# EAGLE board PCB_v36 (EAGLE 9.7.0)
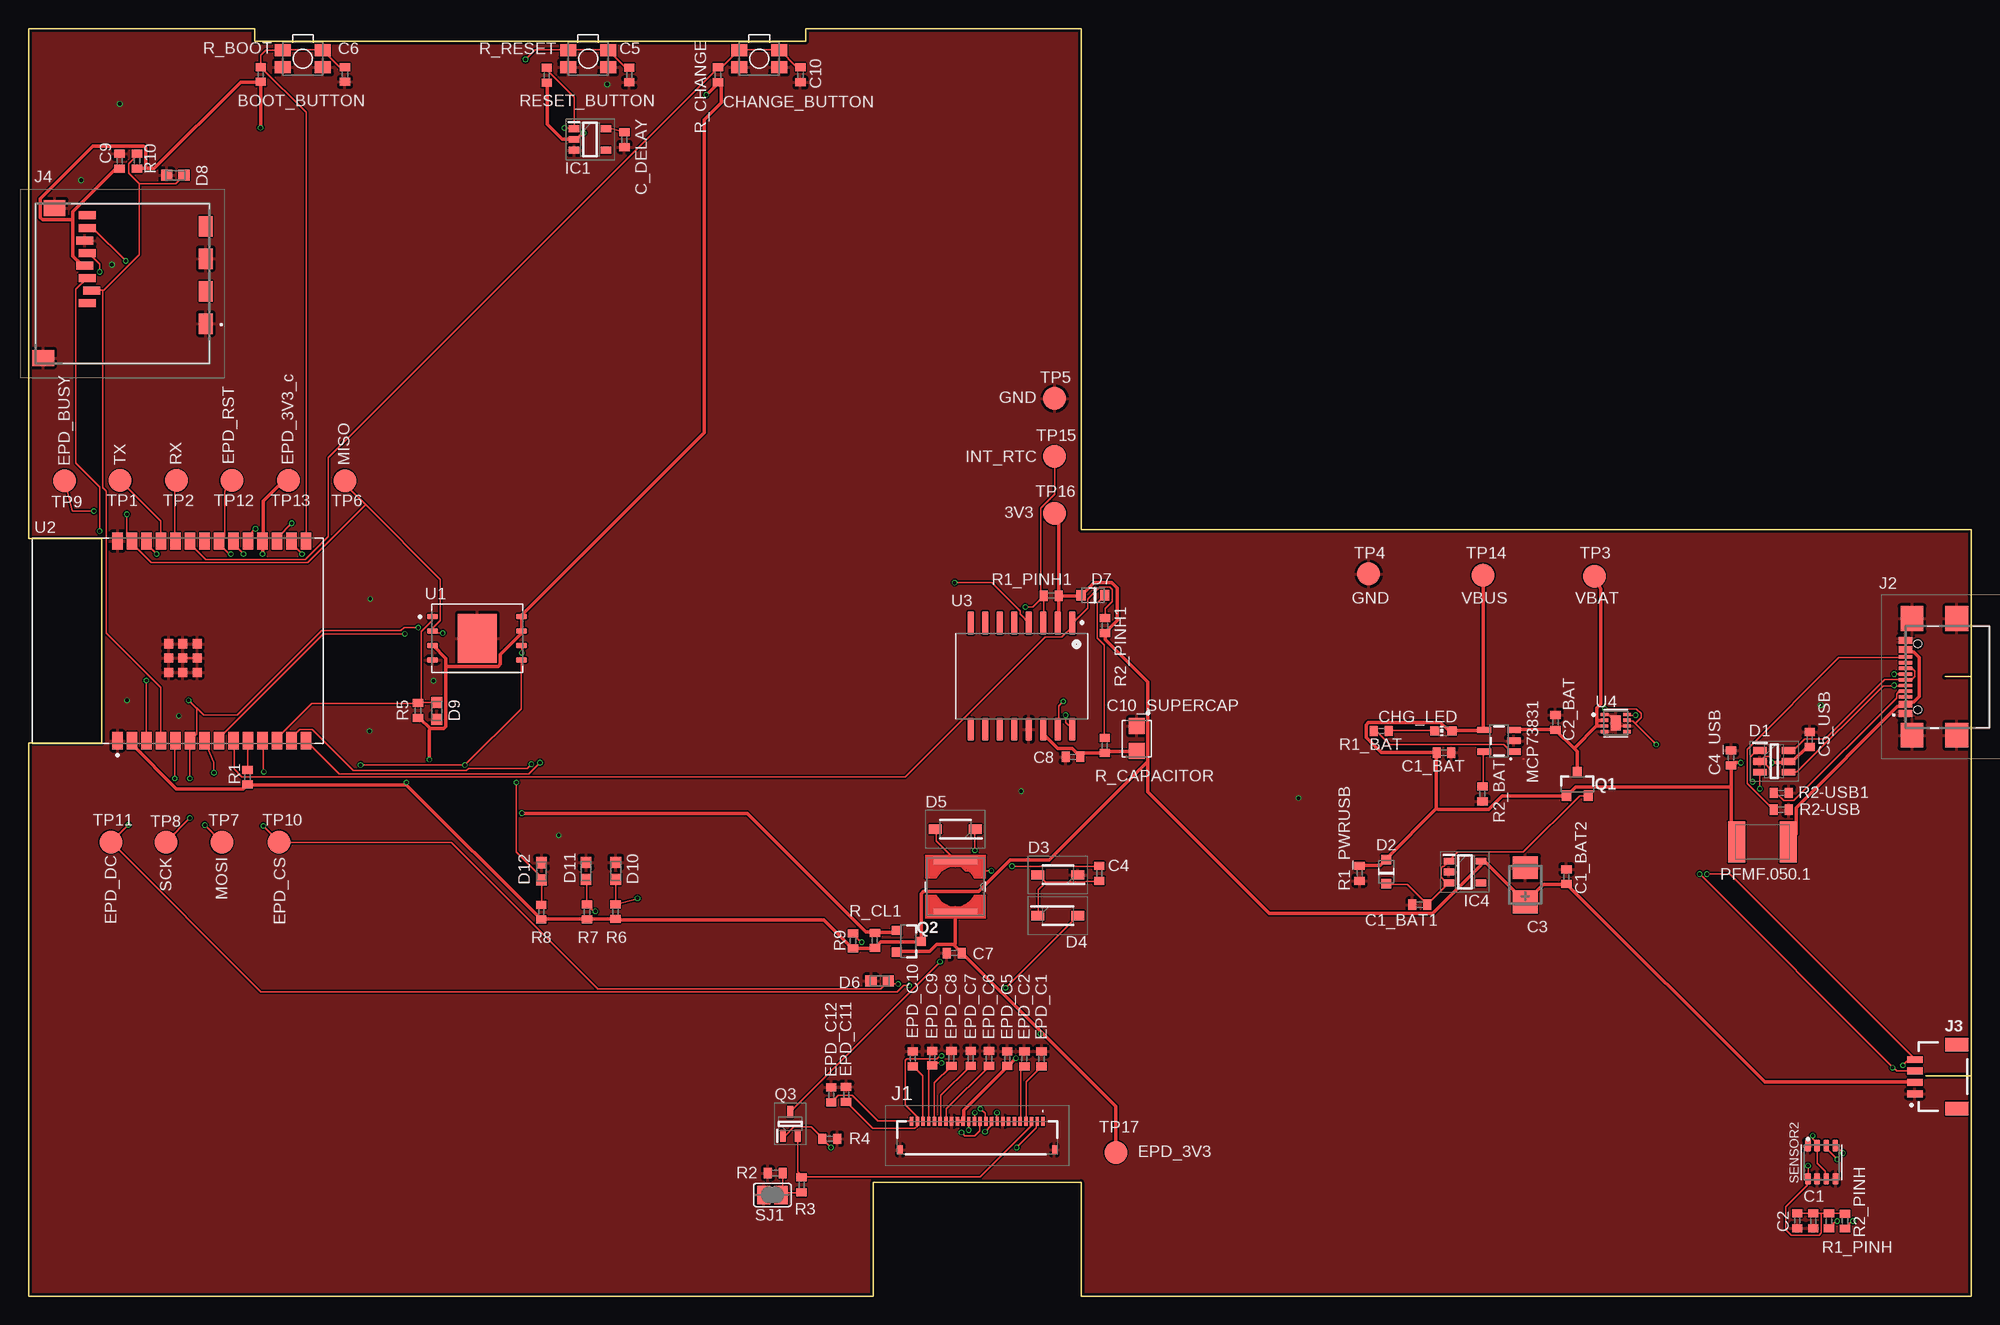
[diagram p0: board, top side]
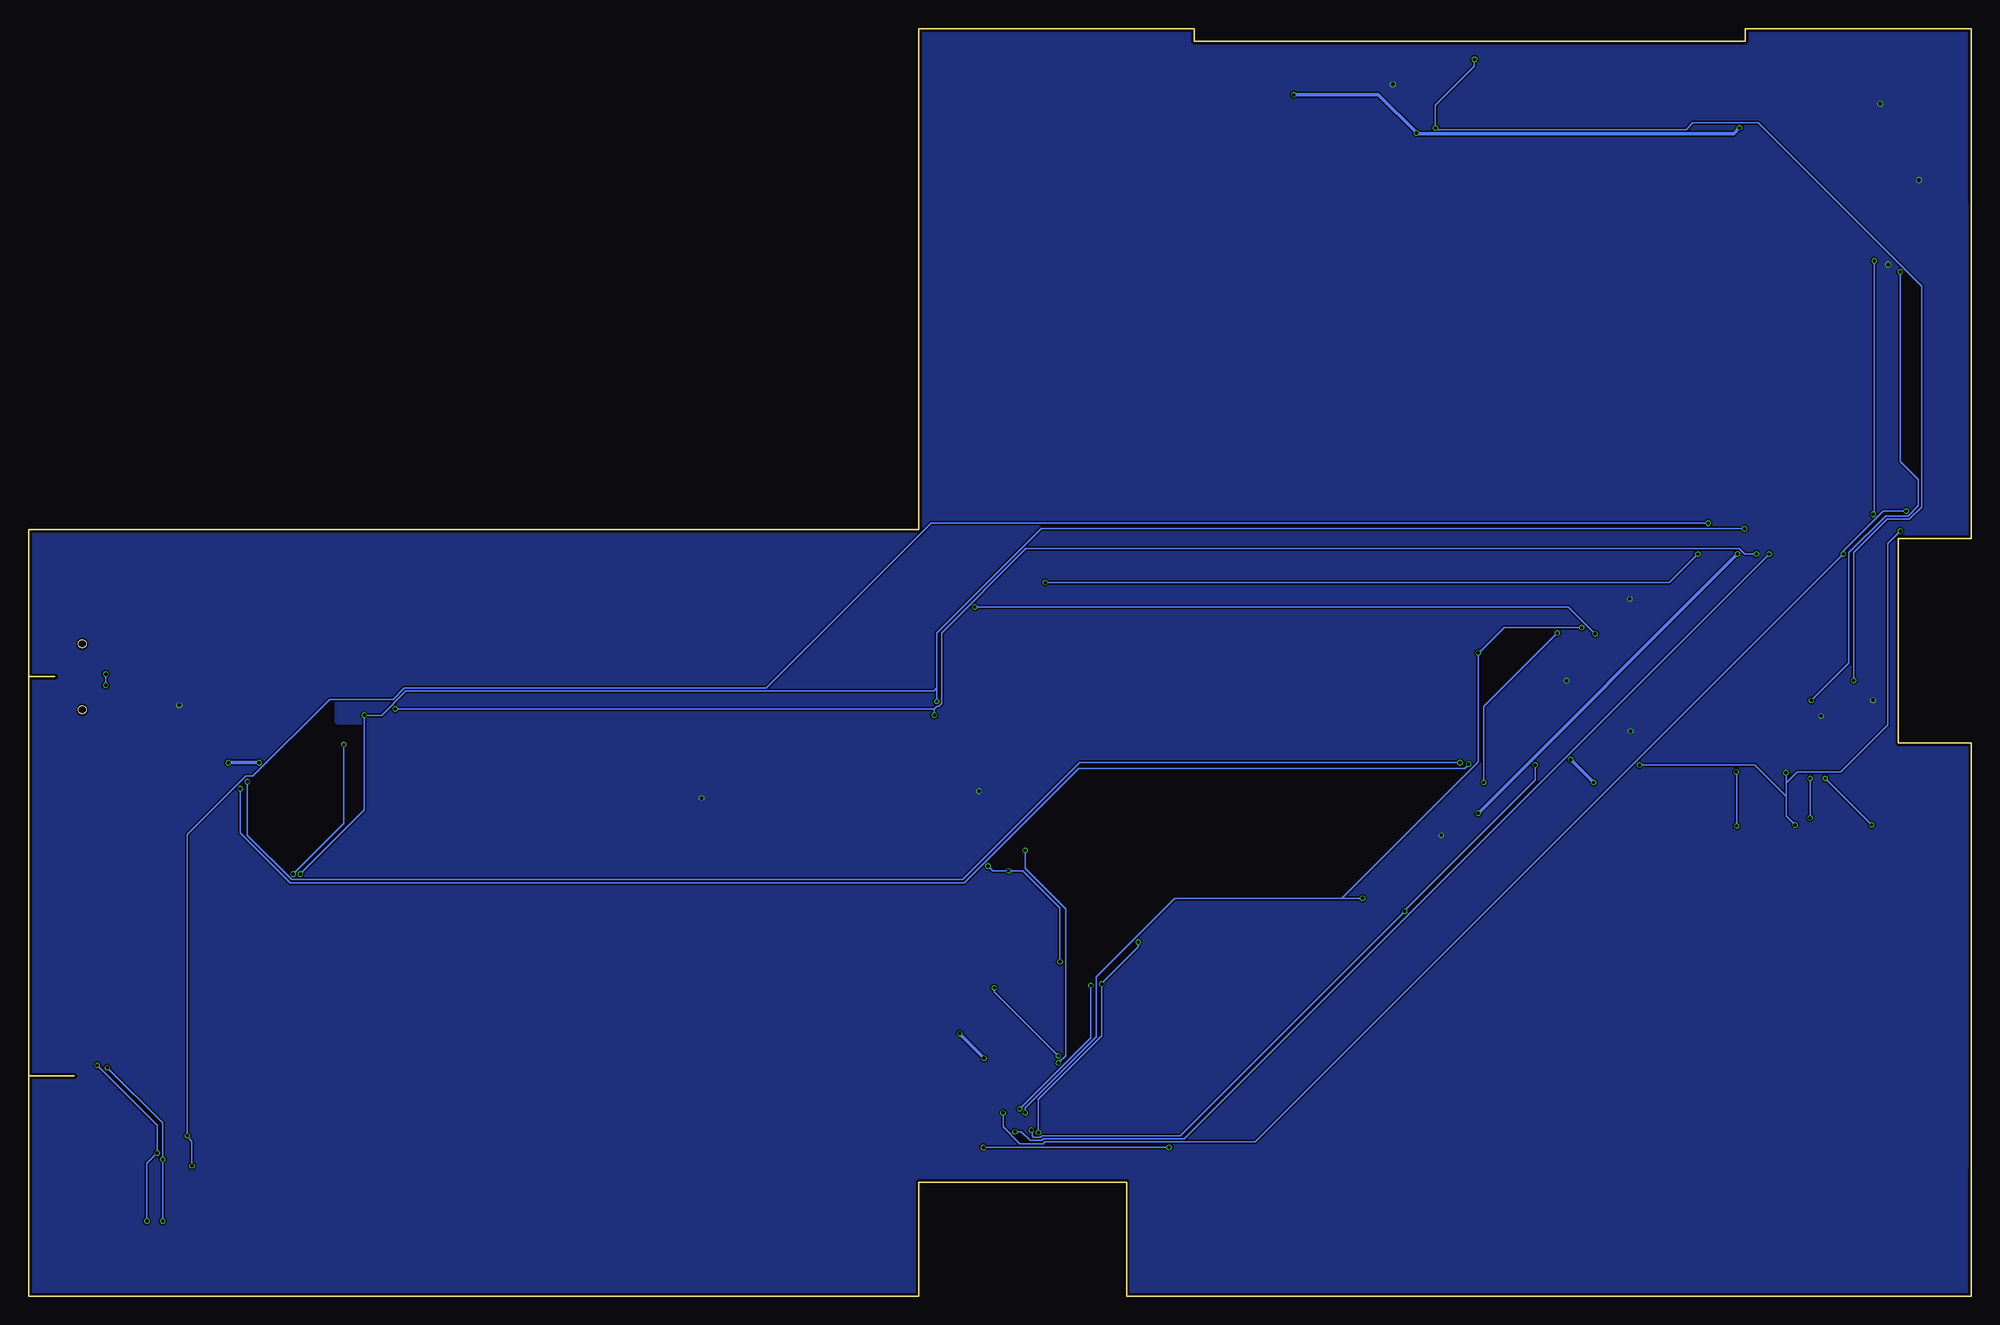
[diagram p1: board, bottom side, seen from below]

Size 170.2 x 111.1 mm. Coordinates in mm from the lower left corner, seen from the top.
Outline: 170.2,54.3 170.2,67.2 92.2,67.2 92.2,111.1 68.1,111.1 68.1,110 19.8,110 19.8,111.1 0,111.1 0,95.8 0,66.4 6.4,66.4 6.4,48.5 0,48.5 0,11.1 0,0 74,0 74,10 92.2,10 92.2,0 170.2,0 170.2,19.3
Outline: 170.2,54.3 170.2,19.3
Outline: 170.2,54.3 167.9,54.3
Outline: 170.2,19.3 166.2,19.3
Copper layers (1*16): Top 0.035mm / dielectric 1.6mm / Bottom 0.035mm
Design rules "jlcpcb-2layers.dru *": minimum track width 0.15mm, minimum drill 0.3mm, track to track 5mil, track to pad 5mil, pad to pad 5mil, via to via 5mil, smd to smd 5mil, copper to edge 0.2mm, drill to drill 6mil, minimum pad ring 10mil, minimum via ring 3mil, stop-mask expansion 4mil, vias tented up to drill 0mil, thermal gap 10mil
Net classes: 1 power: width 0.3 mm

## Footprints (pad centres in the part's own frame; a part is rotated, then mirrored left to right if it is on the bottom)
MYBUTTON = smd 1.4 x 1.05: 1 1.75,0.75; 2 -1.75,0.75; 3 -1.75,-0.75; 4 1.75,-0.75
ESP32_WROVER_EAGLE-LTSPICE_C0402 = smd 0.7 x 0.9: 1 -0.65,0; 2 0.65,0
RCL_CT3528 = smd 2 x 2.2: + -1.5,0; - 1.5,0
CAPCP3225X100N = smd 1.4 x 1.4: 1 -1.1,0; 2 1.1,0
ADAFRUIT_CHIP-LED0603 = smd 0.8 x 0.8: A 0,-0.75; C 0,0.75
SOT95P280X145-6N = smd 1.2 x 0.6: 1 -1.25,0.95; 2 -1.25,0; 3 -1.25,-0.95; 4 1.25,-0.95; 5 1.25,0; 6 1.25,0.95
ESP32_WROVER_AVX---SD0805S020S1R0_AVX_SD0805S020S1R0_0 = smd 0.8 x 0.9: 1 -1.05,0; 2 1.05,0
SOD3716X135N = smd 1.15 x 0.8: 1 -1.75,0; 2 1.75,0
DIOC1608X36N = smd 0.97 x 0.94: 1 -0.75,0; 2 0.75,0
SOT95P280X120-5N = smd 0.9 x 0.6: 1 -1.4,0.95; 2 -1.4,0; 3 -1.4,-0.95; 4 1.4,-0.95; 5 1.4,0.95
FH34SRJ24S05SH99 = smd 0.3 x 0.8: 1 5.75,1.45; 2 5.25,1.45; 3 4.75,1.45; 4 4.25,1.45; 5 3.75,1.45; 6 3.25,1.45; 7 2.75,1.45; 8 2.25,1.45; 9 1.75,1.45; 10 1.25,1.45; 11 0.75,1.45; 12 0.25,1.45; 13 -0.25,1.45; 14 -0.75,1.45; 15 -1.25,1.45; 16 -1.75,1.45; 17 -2.25,1.45; 18 -2.75,1.45; 19 -3.25,1.45; 20 -3.75,1.45; 21 -4.25,1.45; 22 -4.75,1.45; 23 -5.25,1.45; 24 -5.75,1.45 | smd 0.4 x 0.8: MP1 6.75,-1.05; MP2 -6.75,-1.05
SAMACSYS_PARTS_USB4110GFA = smd 0.3 x 1.15: A1 -3.35,3.678; A4 -2.55,3.678; A5 -1.25,3.678; A6 -0.25,3.678; A7 0.25,3.678; A8 1.25,3.678; A9 2.55,3.678; A12 3.35,3.678; B1 3.05,3.678; B4 2.25,3.678; B5 1.75,3.678; B6 0.75,3.678; B7 -0.75,3.678; B8 -1.75,3.678; B9 -2.25,3.678; B12 -3.05,3.678 | smd 2.18 x 2: MP1 -5.11,-0.827; MP2 5.11,-0.827; MP3 -5.11,3.103; MP4 5.11,3.103 | hole 0.65: -2.89,2.603; 2.89,2.603
JST04_1MM_RA = smd 0.6 x 1.35: 1 -1.5,0; 2 -0.5,0; 3 0.5,0; 4 1.5,0 | smd 1.2 x 2: NC1 2.8,-3.675; NC2 -2.8,-3.675
112ATAARR03ATTEND = smd 1.8 x 1.2: G1 10.6,10.4; G2 4.9,10.4; S1 7.75,10.4; S2 2.05,10.4 | smd 1.4 x 1.9: G3 13.6,-3.85; G4 0.45,-2.85 | smd 0.7 x 1.5: P1 8.8,0; P2 7.7,0.4; P3 6.6,0; P4 5.5,-0.2; P5 4.4,0; P6 3.3,-0.2; P7 2.2,0; P8 1.1,0
IND_4828-WE-TPC_WRE = smd 0.635 x 3.81: 1 -2.286,0; 2 2.286,0
ESP32_WROVER_SPARKFUN-IC-POWER_SOT23-5 = smd 0.55 x 1.2: 1 -0.95,-1.3; 2 0,-1.3; 3 0.95,-1.3; 4 0.95,1.3; 5 -0.95,1.3
ESP32C6_VARISTOR_CT/CN1812 = smd 1.5 x 3.6: 1 -2.25,0; 2 2.25,0
ESP32_WROVER_SPARKFUN-DISCRETESEMI_SOT23-3 = smd 0.8 x 0.9: 1 -0.95,-1; 2 0.95,-1; 3 0,1.1
SOT65P210X110-3N = smd 1.05 x 0.5: 1 -1.05,0.65; 2 -1.05,-0.65; 3 1.05,0
ESP32_WROVER_EAGLE-LTSPICE_R0402 = smd 0.7 x 0.9: 1 -0.65,0; 2 0.65,0
ESP32_WROVER_BME680_PSON80P300X300X100-8N = smd 1.016 x 0.5: 1 1.458,1.2; 2 1.458,0.4; 3 1.458,-0.4; 4 1.458,-1.2; 5 -1.458,-1.22; 6 -1.458,-0.4; 7 -1.458,0.4; 8 -1.458,1.2
SJ = smd 1.168 x 1.6: 1 -0.762,0; 2 0.762,0
TP20R = smd 2 x 2: TP 0,0
SON127P600X800X80-9N = smd 0.94 x 0.44: 1 -3.895,1.905; 2 -3.895,0.635; 3 -3.895,-0.635; 4 -3.895,-1.905; 5 3.895,-1.905; 6 3.895,-0.635; 7 3.895,0.635; 8 3.895,1.905 | smd 3.4 x 4.3: 9 0,0
XCVR_ESP32-C6-WROOM-1-N8 = smd 1.5 x 0.9: 1 -8.75,5.26; 2 -8.75,3.99; 3 -8.75,2.72; 4 -8.75,1.45; 5 -8.75,0.18; 6 -8.75,-1.09; 7 -8.75,-2.36; 8 -8.75,-3.63; 9 -8.75,-4.9; 10 -8.75,-6.17; 11 -8.75,-7.44; 12 -8.75,-8.71; 13 -8.75,-9.98; 14 -8.75,-11.25; 15 8.75,-11.25; 16 8.75,-9.98; 17 8.75,-8.71; 18 8.75,-7.44; 19 8.75,-6.17; 20 8.75,-4.9; 21 8.75,-3.63; 22 8.75,-2.36; 23 8.75,-1.09; 24 8.75,0.18; 25 8.75,1.45; 26 8.75,2.72; 27 8.75,3.99; 28 8.75,5.26 | smd 0.8 x 0.8: 29_1 -2.755,0.79; 29_2 -1.505,0.79; 29_3 -0.255,0.79; 29_4 -2.755,-0.46; 29_5 -1.505,-0.46; 29_6 -0.255,-0.46; 29_7 -2.755,-1.71; 29_8 -1.505,-1.71; 29_9 -0.255,-1.71
SOIC127P1032X265-16N = smd 2.05 x 0.59: 1 -4.655,4.445; 2 -4.655,3.175; 3 -4.655,1.905; 4 -4.655,0.635; 5 -4.655,-0.635; 6 -4.655,-1.905; 7 -4.655,-3.175; 8 -4.655,-4.445; 9 4.655,-4.445; 10 4.655,-3.175; 11 4.655,-1.905; 12 4.655,-0.635; 13 4.655,0.635; 14 4.655,1.905; 15 4.655,3.175; 16 4.655,4.445
SON50P200X200X80-9N = smd 0.76 x 0.27: 1 -0.985,0.75; 2 -0.985,0.25; 3 -0.985,-0.25; 4 -0.985,-0.75; 5 0.985,-0.75; 6 0.985,-0.25; 7 0.985,0.25; 8 0.985,0.75 | smd 0.9 x 1.3: 9 0,0

## Placement (x,y rotation side)
BOOT_BUTTON  BUTTON_CUSYOMV1  [MYBUTTON]  24.03,108.44 180 top
C1  100nF  [ESP32_WROVER_EAGLE-LTSPICE_C0402]  156.34,6.61 270 top
C1_BAT  4.7uF  [ESP32_WROVER_EAGLE-LTSPICE_C0402]  123.99,47.64 0 top
C1_BAT1  4.7uF  [ESP32_WROVER_EAGLE-LTSPICE_C0402]  121.87,34.32 180 top
C1_BAT2  4.7uF  [ESP32_WROVER_EAGLE-LTSPICE_C0402]  134.72,36.77 90 top
C2  100nF  [ESP32_WROVER_EAGLE-LTSPICE_C0402]  154.94,6.63 270 top
C2_BAT  4.7uF  [ESP32_WROVER_EAGLE-LTSPICE_C0402]  133.76,50.3 90 top
C3  100uF TANT  [RCL_CT3528]  131.11,36.06 90 top
C4  4.7uF/25V  [ESP32_WROVER_EAGLE-LTSPICE_C0402]  93.8,37.06 90 top
C4_USB  100nF  [ESP32_WROVER_EAGLE-LTSPICE_C0402]  149.14,47.19 90 top
C5  1uF  [ESP32_WROVER_EAGLE-LTSPICE_C0402]  52.62,107.03 270 top
C5_USB  4.7uF  [ESP32_WROVER_EAGLE-LTSPICE_C0402]  156.04,48.8 90 top
C6  100nF  [ESP32_WROVER_EAGLE-LTSPICE_C0402]  27.72,107.08 270 top
C7  10uF  [ESP32_WROVER_EAGLE-LTSPICE_C0402]  81.09,30.08 180 top
C8  100nF  [ESP32_WROVER_EAGLE-LTSPICE_C0402]  91.5,47.28 180 top
C9  100nF  [ESP32_WROVER_EAGLE-LTSPICE_C0402]  7.98,99.48 90 top
C10  100nF  [ESP32_WROVER_EAGLE-LTSPICE_C0402]  67.62,107.04 270 top
C10_SUPERCAP  CPH3225A  [CAPCP3225X100N]  97.08,48.87 270 top
C_DELAY  100nF  [ESP32_WROVER_EAGLE-LTSPICE_C0402]  52.2,101.36 270 top
CHANGE_BUTTON  BUTTON_CUSYOMV1  [MYBUTTON]  64.01,108.44 180 top
CHG_LED  [ADAFRUIT_CHIP-LED0603]  123.95,49.55 90 top
D1  USBLC6-2SC6Y  [SOT95P280X145-6N]  152.92,46.88 0 top
D2  SD0805S020S1R0  [ESP32_WROVER_AVX---SD0805S020S1R0_AVX_SD0805S020S1R0_0]  118.93,37.21 90 top
D3  MBR0530  [SOD3716X135N]  90.17,36.94 180 top
D4  MBR0530  [SOD3716X135N]  90.17,33.36 0 top
D5  MBR0530  [SOD3716X135N]  81.19,40.94 180 top
D6  PGB1010603MR  [DIOC1608X36N]  74.55,27.64 180 top
D7  SD0805S020S1R0  [ESP32_WROVER_AVX---SD0805S020S1R0_AVX_SD0805S020S1R0_0]  93.24,61.43 180 top
D8  PGB1010603MR  [DIOC1608X36N]  12.87,98.24 180 top
D9  PGB1010603MR  [DIOC1608X36N]  35.76,51.29 270 top
D10  PGB1010603MR  [DIOC1608X36N]  51.44,37.29 90 top
D11  PGB1010603MR  [DIOC1608X36N]  48.84,37.27 90 top
D12  PGB1010603MR  [DIOC1608X36N]  44.94,37.25 90 top
EPD_C1  1uF/50V  [ESP32_WROVER_EAGLE-LTSPICE_C0402]  88.74,20.81 90 top
EPD_C2  1uF/50V  [ESP32_WROVER_EAGLE-LTSPICE_C0402]  87.24,20.82 90 top
EPD_C5  1uF/50V  [ESP32_WROVER_EAGLE-LTSPICE_C0402]  85.74,20.83 90 top
EPD_C6  1uF/50V  [ESP32_WROVER_EAGLE-LTSPICE_C0402]  84.14,20.84 90 top
EPD_C7  1uF/50V  [ESP32_WROVER_EAGLE-LTSPICE_C0402]  82.54,20.85 90 top
EPD_C8  1uF/50V  [ESP32_WROVER_EAGLE-LTSPICE_C0402]  80.84,20.86 90 top
EPD_C9  1uF/50V  [ESP32_WROVER_EAGLE-LTSPICE_C0402]  79.16,20.88 90 top
EPD_C10  1uF/50V  [ESP32_WROVER_EAGLE-LTSPICE_C0402]  77.46,20.82 90 top
EPD_C11  1uF/50V  [ESP32_WROVER_EAGLE-LTSPICE_C0402]  71.62,17.69 90 top
EPD_C12  1uF/50V  [ESP32_WROVER_EAGLE-LTSPICE_C0402]  70.32,17.65 90 top
IC1  BD5229G-TR  [SOT95P280X120-5N]  49.19,101.38 0 top
IC4  XC6220A331MR-G  [SOT95P280X120-5N]  125.83,37.18 0 top
J1  FH34SRJ-24S-0.5SH_99_  [FH34SRJ24S05SH99]  83.11,13.88 0 top
J2  [SAMACSYS_PARTS_USB4110GFA]  168.1,54.28 90 top
J3  QWIIC_RIGHT_ANGLE  [JST04_1MM_RA]  165.25,19.25 90 top
J4  112A-TAAR-R03_ATTEND  [112ATAARR03ATTEND]  5.13,95.82 270 top
L1  744043680IND_4828-WE-TPC_WRE  [IND_4828-WE-TPC_WRE]  81.2,35.9 270 top
MCP73831  ESP32_WROVER_SPARKFUN-IC-POWER_MCP73831  [ESP32_WROVER_SPARKFUN-IC-POWER_SOT23-5]  128.82,48.68 90 top
PFMF.050.1  [ESP32C6_VARISTOR_CT/CN1812]  151.89,39.82 180 top
Q1  20V/4.2A/52mΩ/1.4W  [ESP32_WROVER_SPARKFUN-DISCRETESEMI_SOT23-3]  135.67,44.86 0 top
Q2  20V/4.2A/52mΩ/1.4W  [ESP32_WROVER_SPARKFUN-DISCRETESEMI_SOT23-3]  77.06,31.11 270 top
Q3  SI1308EDL-T1-GE3  [SOT65P210X110-3N]  66.73,15.11 90 top
R1  10k  [ESP32_WROVER_EAGLE-LTSPICE_R0402]  19.18,45.49 90 top
R1_BAT  200  [ESP32_WROVER_EAGLE-LTSPICE_R0402]  118.51,49.54 0 top
R1_PINH  10K  [ESP32_WROVER_EAGLE-LTSPICE_R0402]  157.72,6.61 90 top
R1_PINH1  10K  [ESP32_WROVER_EAGLE-LTSPICE_R0402]  89.58,61.4 0 top
R1_PWRUSB  100k  [ESP32_WROVER_EAGLE-LTSPICE_R0402]  116.6,37.07 90 top
R2  2.2  [ESP32_WROVER_EAGLE-LTSPICE_R0402]  65.41,10.8 0 top
R2-USB  5k1  [ESP32_WROVER_EAGLE-LTSPICE_R0402]  153.53,42.64 0 top
R2-USB1  5k1  [ESP32_WROVER_EAGLE-LTSPICE_R0402]  153.55,44.12 180 top
R2_BAT  2k  [ESP32_WROVER_EAGLE-LTSPICE_R0402]  127.36,44.02 90 top
R2_PINH  10K  [ESP32_WROVER_EAGLE-LTSPICE_R0402]  159.12,6.59 90 top
R2_PINH1  10K  [ESP32_WROVER_EAGLE-LTSPICE_R0402]  94.3,58.78 270 top
R3  0.47  [ESP32_WROVER_EAGLE-LTSPICE_R0402]  67.72,9.77 270 top
R4  10k  [ESP32_WROVER_EAGLE-LTSPICE_R0402]  70.19,13.8 0 top
R5  10K  [ESP32_WROVER_EAGLE-LTSPICE_R0402]  34.12,51.33 270 top
R6  10K  [ESP32_WROVER_EAGLE-LTSPICE_R0402]  51.42,33.71 270 top
R7  10K  [ESP32_WROVER_EAGLE-LTSPICE_R0402]  48.92,33.69 270 top
R8  10K  [ESP32_WROVER_EAGLE-LTSPICE_R0402]  44.92,33.67 270 top
R9  10K  [ESP32_WROVER_EAGLE-LTSPICE_R0402]  72.22,31.15 270 top
R10  10K  [ESP32_WROVER_EAGLE-LTSPICE_R0402]  9.51,99.49 270 top
R_BOOT  10K  [ESP32_WROVER_EAGLE-LTSPICE_R0402]  20.34,107.08 90 top
R_CAPACITOR  15  [ESP32_WROVER_EAGLE-LTSPICE_R0402]  94.28,48.26 270 top
R_CHANGE  10K  [ESP32_WROVER_EAGLE-LTSPICE_R0402]  60.4,107.04 90 top
R_CL1  10K  [ESP32_WROVER_EAGLE-LTSPICE_R0402]  74.14,31.19 270 top
R_RESET  10K  [ESP32_WROVER_EAGLE-LTSPICE_R0402]  45.4,107 90 top
RESET_BUTTON  BUTTON_CUSYOMV1  [MYBUTTON]  49.02,108.44 180 top
SENSOR2  BME688  [ESP32_WROVER_BME680_PSON80P300X300X100-8N]  157.07,11.75 90 top
SJ1  [SJ]  65.16,8.88 0 top
TP1  TPTP20R  [TP20R]  8.03,71.5 0 top
TP2  TPTP20R  [TP20R]  12.95,71.5 0 top
TP3  TPTP20R  [TP20R]  137.17,63.1 0 top
TP4  TPTP20R  [TP20R]  117.39,63.3 0 top
TP5  TPTP20R  [TP20R]  89.89,78.68 0 top
TP6  TPTP20R  [TP20R]  27.71,71.48 0 top
TP7  TPTP20R  [TP20R]  16.93,39.78 0 top
TP8  TPTP20R  [TP20R]  12.05,39.78 0 top
TP9  TPTP20R  [TP20R]  3.17,71.48 0 top
TP10  TPTP20R  [TP20R]  21.96,39.8 0 top
TP11  TPTP20R  [TP20R]  7.21,39.8 0 top
TP12  TPTP20R  [TP20R]  17.81,71.5 0 top
TP13  TPTP20R  [TP20R]  22.76,71.5 0 top
TP14  TPTP20R  [TP20R]  127.41,63.2 0 top
TP15  TPTP20R  [TP20R]  89.86,73.6 0 top
TP16  TPTP20R  [TP20R]  89.89,68.6 0 top
TP17  TPTP20R  [TP20R]  95.26,12.6 0 top
U1  W25Q512JVEIQ  [SON127P600X800X80-9N]  39.3,57.66 0 top
U2  ESP32-C6-WROOM-1-N8  [XCVR_ESP32-C6-WROOM-1-N8]  13.06,57.44 90 top
U3  DS3231SN#  [SOIC127P1032X265-16N]  87,54.35 270 top
U4  MAX17048G+T10  [SON50P200X200X80-9N]  139.04,50.23 0 top

## Library data of the parts
BOOT_BUTTON CHANGE_BUTTON CHG_LED PFMF.050.1 RESET_BUTTON SJ1 = DeskAssistant v19 v1
C1 C1_BAT C1_BAT1 C1_BAT2 C2 C2_BAT C4 C4_USB C5 C5_USB C6-C10 C_DELAY EPD_C1 EPD_C2 EPD_C5-EPD_C12 = DeskAssistant v19 v1; SPICEMODEL: NONE; SPICEPREFIX: C
C3 = DeskAssistant v19 v1; SPICEPREFIX: C
C10_SUPERCAP = DeskAssistant v19 v1; AVAILABILITY: Not in stock; CHECK_PRICES: https://www.snapeda.com/parts/CPH3225A/Seiko+Instruments/view-part/?ref=eda; DESCRIPTION: 11 mF (EDLC) Supercapacitor 3.3 V 1210 (3225 Metric) - -; MF: Seiko Instruments; MP: CPH3225A; PACKAGE: 1210 Seiko; PRICE: None; PURCHASE-URL: https://www.snapeda.com/api/url_track_click_mouser/?unipart_id=562593&manufacturer=Seiko Instruments&part_name=CPH3225A&search_term=None; SNAPEDA_LINK: https://www.snapeda.com/parts/CPH3225A/Seiko+Instruments/view-part/?ref=snap
D1 = DeskAssistant v19 v1; AVAILABILITY: In Stock; CHECK_PRICES: https://www.snapeda.com/parts/USBLC6-2SC6Y/STMicroelectronics/view-part/?ref=eda; DESCRIPTION: 17V Clamp 5A (8/20µs) Ipp Tvs Diode Surface Mount SOT-23-6; MF: STMicroelectronics; MP: USBLC6-2SC6Y; PACKAGE: SOT-23-6 STMicroelectronics; PRICE: None; SNAPEDA_LINK: https://www.snapeda.com/parts/USBLC6-2SC6Y/STMicroelectronics/view-part/?ref=snap
D2 = DeskAssistant v19 v1; CENTROID_NOT_SPECIFIED: No; DATASHEET: http://datasheets.avx.com/schottky.pdf; DIGIKEY_DESCRIPTION: DIODE SCHOTTKY 20V 1A 0805; DIGIKEY_PART_NUMBER: 478-7800-1-ND; LEAD_FREE: yes; MF: AVX; MOUSER_PART_NUMBER: 581-SD0805S020S1R0; PACKAGE: 0805 (2012 metric); PREFIX: D; ROHS: yes; TEMPERATURE_RANGE_HIGH: +125°C; TEMPERATURE_RANGE_LOW: -55°C
D3-D5 = DeskAssistant v19 v1; AVAILABILITY: In Stock; CHECK_PRICES: https://www.snapeda.com/parts/MBR0530/Onsemi/view-part/?ref=eda; DESCRIPTION: Diode Schottky 30 V 500mA Surface Mount SOD-123; MF: ON Semiconductor; MP: MBR0530; PACKAGE: SOD-123-2 ON Semiconductor; PRICE: None; PURCHASE-URL: https://www.snapeda.com/api/url_track_click_mouser/?unipart_id=179458&manufacturer=ON Semiconductor&part_name=MBR0530&search_term=None; SNAPEDA_LINK: https://www.snapeda.com/parts/MBR0530/Onsemi/view-part/?ref=snap
D6 D8-D12 = DeskAssistant v19 v1; AVAILABILITY: In Stock; CHECK_PRICES: https://www.snapeda.com/parts/PGB1010603MR/Littelfuse/view-part/?ref=eda; DESCRIPTION: 150V (Typ) Clamp - Ipp Tvs Diode Surface Mount 0603 (1608 Metric); MF: Littelfuse Inc.; MP: PGB1010603MR; PACKAGE: 0603 Littelfuse Inc.; PRICE: None; PURCHASE-URL: https://www.snapeda.com/api/url_track_click_mouser/?unipart_id=5659453&manufacturer=Littelfuse Inc.&part_name=PGB1010603MR&search_term=None; SNAPEDA_LINK: https://www.snapeda.com/parts/PGB1010603MR/Littelfuse/view-part/?ref=snap
D7 = DeskAssistant v19 v1; ATT1: SD0805S020S1R0; CENTROID_NOT_SPECIFIED: No; DATASHEET: http://datasheets.avx.com/schottky.pdf; DIGIKEY_DESCRIPTION: DIODE SCHOTTKY 20V 1A 0805; DIGIKEY_PART_NUMBER: 478-7800-1-ND; LEAD_FREE: yes; MF: AVX; MOUSER_PART_NUMBER: 581-SD0805S020S1R0; PACKAGE: 0805 (2012 metric); PREFIX: D; ROHS: yes; TEMPERATURE_RANGE_HIGH: +125°C; TEMPERATURE_RANGE_LOW: -55°C
IC1 = DeskAssistant v19 v1; DESCRIPTION: Voltage Detector with Adjustable Delay Time: CMOS processes are utilized to develop high precision, low current consumption CMOS reset ICs that allow arbitrary setting of the delay time. The extensive lineup includes both Nch Open Drain and CMOS output types in a wide range of detection voltages (from 2.3V to 6.0V, in 0.1V steps), enabling selection of the ideal solution based on customer requirements. In addition, the entire series is of course both lead-free and RoHS-compliant.; HEIGHT: 1.25mm; MANUFACTURER_NAME: ROHM Semiconductor; MANUFACTURER_PART_NUMBER: BD5229G-TR; MOUSER_PART_NUMBER: 755-BD5229G-TR; MOUSER_PRICE-STOCK: https://www.mouser.co.uk/ProductDetail/ROHM-Semiconductor/BD5229G-TR?qs=4kLU8WoGk0vvnhrrYwdszw%3D%3D
IC4 = DeskAssistant v19 v1; DESCRIPTION: LDO Voltage Regulators; HEIGHT: 1.2mm; MANUFACTURER_NAME: Torex; MANUFACTURER_PART_NUMBER: XC6220A331MR-G; MOUSER_PART_NUMBER: 865-XC6220A331MR-G; MOUSER_PRICE-STOCK: https://www.mouser.co.uk/ProductDetail/Torex-Semiconductor/XC6220A331MR-G?qs=AsjdqWjXhJ8ZSWznL1J0gg%3D%3D
J1 = DeskAssistant v19 v1; DESCRIPTION: 24 Position FFC, FPC Connector Contacts, Top and Bottom 0.020" (0.50mm) Surface Mount, Right Angle; HEIGHT: 1.1mm; MANUFACTURER_NAME: Hirose; MANUFACTURER_PART_NUMBER: FH34SRJ-24S-0.5SH(99); MOUSER_PART_NUMBER: 798-FH34SRJ24S05SH99; MOUSER_PRICE-STOCK: https://www.mouser.co.uk/ProductDetail/Hirose-Connector/FH34SRJ-24S-0.5SH99?qs=vcbW%252B4%252BSTIpKBl5ap9J8Fw%3D%3D
J2 = DeskAssistant v19 v1; DESCRIPTION: CONN USB 2.0 TYPE-C R/A SMT; HEIGHT: 3.26mm; MANUFACTURER_NAME: GCT (GLOBAL CONNECTOR TECHNOLOGY); MANUFACTURER_PART_NUMBER: USB4110-GF-A; MOUSER_PART_NUMBER: 640-USB4110-GF-A; MOUSER_PRICE-STOCK: https://www.mouser.co.uk/ProductDetail/GCT/USB4110-GF-A?qs=KUoIvG%2F9IlYiZvIXQjyJeA%3D%3D
J3 = DeskAssistant v19 v1; PROD_ID: CONN-13694
J4 = DeskAssistant v19 v1; DESCRIPTION: Micro SD Card Socket, Push-Push Type, Top Mount, SMT, H=1.83mm, 10u; HEIGHT: 1.9mm; MANUFACTURER_NAME: ATTEND; MANUFACTURER_PART_NUMBER: 112A-TAAR-R03 ATTEND
L1 = DeskAssistant v19 v1; COPYRIGHT: Copyright (C) 2024 Ultra Librarian. All rights reserved.; MANUFACTURER_PART_NUMBER: 744043680; MFR_NAME: Wurth Electronics
MCP73831 = DeskAssistant v19 v1; PROD_ID: IC-09995
Q1 = DeskAssistant v19 v1; PROD_ID: TRAN-14388
Q2 = DeskAssistant v19 v1; ATT1: DMG2305UX-7; PROD_ID: TRAN-14388
Q3 = DeskAssistant v19 v1; AVAILABILITY: In Stock; CHECK_PRICES: https://www.snapeda.com/parts/SI1308EDL-T1-GE3/Vishay+Siliconix/view-part/?ref=eda; DESCRIPTION: Si1308EDL-T1-GE3 N-channel MOSFET Transistor, 1.5 A, 30 V, 3-Pin SC-70 | Siliconix / Vishay SI1308EDL-T1-GE3; MF: Vishay Siliconix; MP: SI1308EDL-T1-GE3; PACKAGE: SOT-323 Vishay Semiconductor; PRICE: None; PURCHASE-URL: https://www.snapeda.com/api/url_track_click_mouser/?unipart_id=274603&manufacturer=Vishay Siliconix&part_name=SI1308EDL-T1-GE3&search_term=None; SNAPEDA_LINK: https://www.snapeda.com/parts/SI1308EDL-T1-GE3/Vishay+Siliconix/view-part/?ref=snap
R1 R1_BAT R1_PINH R1_PINH1 R1_PWRUSB R2 R2-USB R2-USB1 R2_BAT R2_PINH R2_PINH1 R3-R10 R_BOOT R_CAPACITOR R_CHANGE R_CL1 R_RESET = DeskAssistant v19 v1; SPICEMODEL: NONE; SPICEPREFIX: R
SENSOR2 = DeskAssistant v19 v1; AVAILABILITY: Unavailable; DESCRIPTION: Integrated Environmental Unit; MF: Bosch Sensortec; MP: BME680; PACKAGE: LGA-8 Bosch Tools; PRICE: None
TP1 = DeskAssistant v19 v1; ATT: TX
TP2 = DeskAssistant v19 v1; ARR: RX
TP3 = DeskAssistant v19 v1; A: VBAT
TP4 TP5 = DeskAssistant v19 v1; A: GND
TP6 = DeskAssistant v19 v1; A: MISO
TP7 = DeskAssistant v19 v1; A: MOSI
TP8 = DeskAssistant v19 v1; A: SCK
TP9 = DeskAssistant v19 v1; A: EPD_BUSY
TP10 = DeskAssistant v19 v1; A: EPD_CS
TP11 = DeskAssistant v19 v1; A: EPD_DC
TP12 = DeskAssistant v19 v1; A: EPD_RST
TP13 = DeskAssistant v19 v1; A: EPD_3V3_c
TP14 = DeskAssistant v19 v1; A: VBUS
TP15 = DeskAssistant v19 v1; A: INT_RTC
TP16 = DeskAssistant v19 v1; A: 3V3
TP17 = DeskAssistant v19 v1; A: EPD_3V3
U1 = DeskAssistant v19 v1; AVAILABILITY: In Stock; CHECK_PRICES: https://www.snapeda.com/parts/W25Q512JVEIQ/Winbond+Electronics/view-part/?ref=eda; DESCRIPTION: FLASH - NOR Memory IC 512Mb (64M x 8) SPI - Quad I/O 133 MHz 8-WSON (8x6); MF: Winbond Electronics; MP: W25Q512JVEIQ; PACKAGE: Package; PRICE: None; SNAPEDA_LINK: https://www.snapeda.com/parts/W25Q512JVEIQ/Winbond+Electronics/view-part/?ref=snap
U2 = DeskAssistant v19 v1; AVAILABILITY: In Stock; CHECK_PRICES: https://www.snapeda.com/parts/ESP32-C6-WROOM-1-N8/Espressif+Systems/view-part/?ref=eda; DESCRIPTION: Multiprotocol Modules ESP32-C6 module, Wi-Fi 6 in 2.4 GHz band, Bluetooth 5, Zigbee 3.0 and Thread. ESP34-WROOM Compatible - ENGINEERING SAMPLE; MF: Espressif Systems; MP: ESP32-C6-WROOM-1-N8; PACKAGE: None; PRICE: None; SNAPEDA_LINK: https://www.snapeda.com/parts/ESP32-C6-WROOM-1-N8/Espressif+Systems/view-part/?ref=snap
U3 = DeskAssistant v19 v1; AVAILABILITY: In Stock; CHECK_PRICES: https://www.snapeda.com/parts/DS3231SN%23/Analog+Devices/view-part/?ref=eda; DESCRIPTION: Extremely Accurate I²C-Integrated RTC/TCXO/Crystal; MF: Analog Devices; MP: DS3231SN#; PACKAGE: SOIC-16 Maxim; PRICE: None; PURCHASE-URL: https://www.snapeda.com/api/url_track_click_mouser/?unipart_id=99048&manufacturer=Analog Devices&part_name=DS3231SN#&search_term=None; SNAPEDA_LINK: https://www.snapeda.com/parts/DS3231SN%23/Analog+Devices/view-part/?ref=snap
U4 = DeskAssistant v19 v1; AVAILABILITY: In Stock; CHECK_PRICES: https://www.snapeda.com/parts/MAX17048G+T10/Analog+Devices/view-part/?ref=eda; DESCRIPTION: 3µA 1-Cell/2-Cell Fuel Gauge with ModelGauge; MF: Analog Devices; MP: MAX17048G+T10; PACKAGE: TDFN-8 Maxim; PRICE: None; PURCHASE-URL: https://www.snapeda.com/api/url_track_click_mouser/?unipart_id=329239&manufacturer=Analog Devices&part_name=MAX17048G+T10&search_term=None; SNAPEDA_LINK: https://www.snapeda.com/parts/MAX17048G+T10/Analog+Devices/view-part/?ref=snap

## Nets
3V3 [power]: C1_BAT2.1 C3.+ C9.1 D7.2 IC1.2 IC4.5 J3.2 J4.P4 Q2.3 R1.1 R1_PINH1.2 R2_PINH1.2 R5.2 R6.2 R7.2 R8.2 R9.2 R10.2 R_BOOT.1 R_CHANGE.1 R_CL1.2 R_RESET.1 TP16.TP U1.3 U1.7 U1.8 U2.2 U3.2
32KHZ: R2_PINH1.1 U2.9 U3.1
DN: D1.4 J2.A7 J2.B7
DP: D1.6 J2.A6 J2.B6
EPD_3V3 [power]: C7.1 EPD_C5.1 J1.15 J1.16 L1.2 Q2.2 TP17.TP
EPD_3V3_C [power]: Q2.1 R_CL1.1 TP13.TP U2.18
EPD_BUSY: J1.9 TP9.TP U2.26
EPD_CS: D6.1 J1.12 R9.1 TP10.TP U2.11
EPD_DC: J1.11 TP11.TP U2.5
EPD_RST: J1.10 TP12.TP U2.21
FLASH_CS: D9.1 R5.1 U1.1 U2.12
GDR: J1.2 Q3.1 R4.1
GND: BOOT_BUTTON.1 BOOT_BUTTON.2 C1.2 C1_BAT1.2 C1_BAT2.2 C1_BAT.2 C2.2 C2_BAT.2 C3.- C4_USB.2 C5.2 C5_USB.2 C6.2 C7.2 C8.2 C9.2 C10.2 C10_SUPERCAP.1 C_DELAY.2 CHANGE_BUTTON.1 CHANGE_BUTTON.2 D1.2 D3.1 D6.2 D8.2 D9.2 D10.2 D11.2 D12.2 EPD_C1.2 EPD_C2.2 EPD_C5.2 EPD_C6.2 EPD_C7.2 EPD_C8.2 EPD_C9.2 EPD_C10.2 EPD_C11.2 EPD_C12.2 IC1.3 IC4.2 J1.8 J1.17 J1.MP1 J1.MP2 J2.A1 J2.A12 J2.B1 J2.B12 J2.MP1 J2.MP2 J2.MP3 J2.MP4 J3.1 J4.G1 J4.G2 J4.G3 J4.G4 J4.P6 MCP73831.2 R1_PWRUSB.1 R2-USB1.1 R2-USB.2 R2.1 R2_BAT.1 R4.2 RESET_BUTTON.1 RESET_BUTTON.2 SENSOR2.1 SENSOR2.5 SENSOR2.7 SJ1.1 TP4.TP TP5.TP U1.4 U1.9 U2.1 U2.28 U2.29_1 U2.29_2 U2.29_3 U2.29_4 U2.29_5 U2.29_6 U2.29_7 U2.29_8 U2.29_9 U3.13 U4.1 U4.4 U4.6 U4.9
GPIO8: R1.2 U2.10
I2C_PW: C1.1 C2.1 R1_PINH.2 R2_PINH.2 SENSOR2.2 SENSOR2.6 SENSOR2.8 U2.17
INT_RTC: R1_PINH1.1 TP15.TP U2.8 U3.3
IO/BOOT: BOOT_BUTTON.3 BOOT_BUTTON.4 C6.1 R_BOOT.2 U2.15
IO/CHANGE: C10.1 CHANGE_BUTTON.3 CHANGE_BUTTON.4 R_CHANGE.2 U2.23
MISO: D12.1 J4.P7 R8.1 TP6.TP U1.2 U2.27
MOSI: D11.1 J1.14 J4.P3 R7.1 TP7.TP U1.5 U2.7
N$1: J2.A5 R2-USB1.2
N$2: C4.1 D3.2 D4.1
N$3: MCP73831.1 R1_BAT.1
N$4: CHG_LED.C R1_BAT.2
N$5: J2.B5 R2-USB.1
N$6: MCP73831.5 R2_BAT.2
N$8: EPD_C10.1 J1.22
N$9: EPD_C12.1 J1.24
N$10: C1_BAT1.1 D2.1 IC4.1 IC4.3 Q1.2
N$11: EPD_C8.1 J1.20
N$12: EPD_C7.1 J1.19
N$13: EPD_C6.1 J1.18
N$14: EPD_C2.1 J1.5
N$15: EPD_C1.1 J1.4
N$16: C_DELAY.1 IC1.5
N$17: D7.1 R_CAPACITOR.1
PREVGH: D5.1 EPD_C9.1 J1.21
PREVGL: D4.2 EPD_C11.1 J1.23
RESE: J1.3 Q3.2 R3.1
RESE': R2.2 R3.2 SJ1.2
RESET: C5.1 IC1.1 R_RESET.2 RESET_BUTTON.3 RESET_BUTTON.4 U2.3
RTC_RST: U2.16 U3.4
RX: TP2.TP U2.24
SCK: D10.1 J1.13 J4.P5 R6.1 TP8.TP U1.6 U2.6
SCL: J3.4 R2_PINH.1 SENSOR2.4 U2.20 U3.16 U4.7
SDA: J3.3 R1_PINH.1 SENSOR2.3 U2.19 U3.15 U4.8
SRC: C4.2 D5.2 L1.1 Q3.3
SS_SD: D8.1 J4.P2 R10.1 U2.4
TX: TP1.TP U2.25
USB_D+: D1.1 U2.14
USB_D-: D1.3 U2.13
VBAT [power]: C2_BAT.1 MCP73831.3 Q1.3 TP3.TP U4.2 U4.3
VBUS [power]: C1_BAT.1 C4_USB.1 C5_USB.1 CHG_LED.A D1.5 D2.2 MCP73831.4 PFMF.050.1.2 Q1.1 R1_PWRUSB.2 TP14.TP
VRTC [power]: C8.1 C10_SUPERCAP.2 R_CAPACITOR.2 U3.14
VUSB [power]: J2.A4 J2.A9 J2.B4 J2.B9 PFMF.050.1.1

## Tracks (layer width: path | path; a pad name or v marks a point on that pad's centre or on a via)
3V3  (via drill 0.3)
  Top 0.3: R_RESET.1 45.43,106.32 45.43,102.72 46.74,101.4 47.78,101.4 IC1.2 47.92,101.47 48.13,101.47 v48.61,101.96 | R_CHANGE.1 60.4,106.3 | 60.4,106.3 60.4,106.29 59.4,105.29 v59.38,105.29 | 3.88,94.34 3.88,91.15 4.64,90.39 4.92,90.39 J4.P4 | 3.88,94.34 3.88,95.03 7.62,98.77 7.96,98.77 C9.1 | 10.25,98.84 9.56,98.84 R10.2 | 3.88,94.34 1.25,94.34 1.04,94.55 1.04,96.21 5.61,100.78 10.11,100.78 10.25,100.64 10.25,98.84 | v20.32,102.4 20.32,106.41 R_BOOT.1 20.29,106.39 18.57,106.39 11.02,98.84 10.25,98.84 | J3.2 165.23,18.79 152.07,18.79 134.83,36.03 C1_BAT2.1 134.69,36.1 132.68,36.1 131.23,34.65 C3.+ 131.09,34.58 127.56,38.11 127.28,38.11 IC4.5 127.21,37.97 127.21,37.76 122.99,33.54 108.69,33.54 98.03,44.2 98.03,46.87 | 35.18,49.74 34.28,50.64 34.14,50.64 R5.2 | 35.18,49.74 36.36,49.74 36.56,49.95 36.56,55.21 | 36.56,55.21 36.56,55.91 35.46,57.01 U1.3 | 36.56,55.21 41.13,55.21 41.34,55.42 41.34,56.25 43.07,57.98 43.07,58.19 U1.7 43.21,58.33 43.21,59.51 U1.8 43.21,59.71 59.21,75.71 59.21,103.11 60.7,104.6 60.7,106 60.4,106.3 | 90.25,61.38 92.17,61.38 D7.2 92.31,61.51 93.35,62.55 94.87,62.55 95.36,62.07 95.36,59.23 94.32,58.19 R2_PINH1.2 94.32,57.98 94.32,57.57 98.06,53.83 98.06,46.9 98.03,46.87 | TP16.TP 90.22,68.4 R1_PINH1.2 90.25,61.38 | U3.2 90.26,59.09 90.26,61.37 90.25,61.38 | U2.2 9.07,48.63 9.07,48.36 12.95,44.48 18.82,44.48 R1.1 19.32,44.83 33.1,44.83 | 33.1,44.83 44.8,33.12 R8.2 44.94,33.05 48.89,33.05 R7.2 49.03,33.05 51.38,33.05 R6.2 51.52,32.98 69.67,32.98 72.09,30.56 R9.2 74.1,30.49 R_CL1.2 74.24,30.63 74.65,31.04 78.11,31.04 Q2.3 78.18,31.25 78.18,35.27 78.39,35.48 83.24,35.48 84.85,37.08 84.85,37.11 85.99,38.25 89.4,38.25 98.03,46.87
  Top 0.3: v35.11,47.04 35.11,49.6 35.18,49.74 | v33.1,45.03 33.1,44.83
  Bottom 0.3: v59.38,105.29 51.95,105.29 v48.61,101.96 48.48,101.89 20.84,101.89 v20.32,102.4 | v33.1,45.03 v35.11,47.04
32KHZ
  Top 0.15: R2_PINH1.1 94.32,59.44 94.32,60.27 94.94,60.89 94.94,61.93 94.73,62.14 93.83,62.14 92.8,61.1 92.8,60.34 91.48,59.02 U3.1 91.41,58.95 91.41,58.68 90.51,57.77 89.06,57.77 76.8,45.52 18.7,45.52 18,46.21 18,48.63 U2.9
DN  (via drill 0.3)
  Top 0.15: 163.43,53.48 162.46,53.48 154.91,45.93 154.22,45.93 D1.4 | 163.43,53.48 164.4,53.48 J2.B7 | v163.43,54.52 164.4,54.52 J2.A7 | v163.43,53.55 163.43,53.48
  Bottom 0.15: v163.43,53.55 v163.43,54.52
DP
  Top 0.15: J2.B6 164.47,55 165.02,55 165.23,54.8 165.23,54.31 164.95,54.04 164.47,54.04 J2.A6 164.4,54.04 162.6,54.04 157.41,48.84 155.6,48.84 154.63,47.87 154.22,47.87 D1.6
EPD_3V3  (via drill 0.3)
  Top 0.3: J1.16 J1.15 81.92,15.46 81.92,16.28 85.74,20.09 85.74,20.11 | 81.02,30.84 79.57,30.84 78.94,30.21 76.11,30.21 Q2.2 | 81.02,30.84 81.72,30.14 C7.1 81.85,30.01 88.74,23.12 | 88.74,23.12 95.22,16.64 95.22,12.62 TP17.TP | L1.2 81.16,33.61 81.16,30.91 81.02,30.84 | v88.64,23.01 88.74,23.12 | 85.74,20.11 EPD_C5.1 | v86.49,20.86 85.74,20.11
  Bottom 0.3: v88.64,23.01 v86.49,20.86
EPD_3V3_C  (via drill 0.3)
  Top 0.3: Q2.1 76.04,32.01 75.9,31.88 74.17,31.88 R_CL1.1 74.03,31.94 73.34,31.94 62.95,42.33 v43.21,42.33 | TP13.TP 21.85,70.97 20.57,69.69 20.57,66.22 U2.18 20.5,66.08 v20.5,65.05
  Bottom 0.3: v20.5,65.05 v43.21,42.33
EPD_BUSY  (via drill 0.3)
  Top 0.15: v84.83,16.09 84.83,15.39 J1.9 | v11.22,65.05 10.39,65.88 10.39,66.15 U2.26 | v5.72,68.82 3.82,68.82 TP9.TP
  Bottom 0.15: v84.83,16.09 84.83,14.84 83.37,13.38 81.32,13.38 81.18,13.52 62.74,13.52 v11.22,65.05 11.22,65.31 7.72,68.82 v5.72,68.82
EPD_CS  (via drill 0.3)
  Top 0.15: v20.57,41.22 21.95,39.84 TP10.TP 22.02,39.77 37.05,39.77 49.86,26.96 74.65,26.96 75.28,27.58 D6.1 75.34,27.58 75.55,27.37 v76.17,27.37 | v81.73,14.36 82.02,14.08 82.89,14.08 83.31,14.49 83.31,15.32 J1.12 | v72.99,31.04 72.92,31.04 72.23,31.74 R9.1 | v20.61,45.96 20.57,46 20.57,48.62 U2.11
  Bottom 0.15: v81.73,14.36 81.73,17.25 76.17,22.8 v76.17,27.37 76.17,27.44 72.99,30.63 v72.99,31.04 | v20.57,41.22 20.57,45.92 v20.61,45.96
EPD_DC  (via drill 0.3)
  Top 0.15: v83.38,16.43 83.79,16.02 83.79,15.39 J1.11 | v77.14,27.23 76.66,27.23 76.11,26.68 20.36,26.68 7.27,39.77 TP11.TP 7.23,39.8 v8.74,41.31 | v12.81,45.38 12.81,48.63 U2.5
  Bottom 0.15: v83.38,16.43 77.14,22.66 v77.14,27.23 | v8.74,41.31 v12.81,45.38
EPD_RST  (via drill 0.3)
  Top 0.15: v83.79,14.42 84.35,14.98 84.35,15.32 J1.10 | v17.73,65.05 17.59,65.05 16.76,65.88 16.76,66.15 U2.21 16.76,66.22 17.17,66.64 17.17,70.57 TP12.TP
  Bottom 0.15: v83.79,14.42 83.24,14.42 82.47,13.66 81.44,13.66 81.3,13.8 68.97,13.8 v17.73,65.05
FLASH_CS
  Top 0.15: R5.1 34.14,52.03 35.73,52.03 D9.1 | U1.1 35.39,59.51 35.39,59.23 34.42,58.26 34.42,52.1 R5.1 | U2.12 21.81,48.7 21.81,48.98 24.79,51.96 34.07,51.96 R5.1
GDR  (via drill 0.3)
  Top 0.15: v86.56,13.04 88.29,14.77 88.29,15.32 J1.2 | v70.29,13.04 69.6,13.73 R4.1 69.53,13.87 68.56,14.84 67.03,14.84 66.27,14.08 66.13,14.08 Q3.1
  Bottom 0.15: v70.29,13.04 v86.56,13.04
GND  (via drill 0.3, 0.35)
  Top 0.15: 39.27,57.64 U1.9 | 14.75,55.91 U2.29_8 | 7.83,48.7 U2.1 | 138.99,50.09 138.99,50.23 U4.9 | 139.05,50.3 U4.9 | 138.99,50.02 138.99,50.03 U4.9 | 117.38,63.25 TP4.TP | 131.02,47.11 130.95,47.11
  Top 0.152: U2.29_5 U2.29_8 | U4.1 138.37,50.98 139.05,50.3 | U4.6 139.04,49.98 138.99,50.03 | 152.47,46.23 152.47,46.31 151.91,46.88 D1.2 152.09,47.3 152.6,47.3 | J2.B12 J2.A1
  Bottom 0.15: 35.4,53.94 v35.47,53.94
  other vias: 29.87,49.53 46.44,40.39 8.63,52.23 13.16,50.87 29.93,61.11 86.96,44.26 111.25,43.67 4.6,97.8 8,104.5 7.3,90.4 50.7,106.2 157,51.8
  pour Top: 73.96,10.06 73.98,10.08 92.22,10.08 92.24,10.06 92.26,10.04 92.28,10.02 92.28,0.08 170.12,0.08 170.12,67.12 92.18,67.12 92.16,67.14 92.14,67.16 92.12,67.18 92.12,111.02 68.18,111.02 68.18,109.98 68.16,109.96 68.14,109.94 68.12,109.92 19.78,109.92 19.76,109.94 19.74,109.96 19.72,109.98 19.72,111.02 0.08,111.02 0.08,66.48 6.42,66.48 6.44,66.46 6.46,66.44 6.48,66.42 6.48,48.48 6.46,48.46 6.44,48.44 6.42,48.42 0.08,48.42 0.08,0.08 73.92,0.08 73.92,10.02 73.94,10.04
  pour Bottom: 6.42,48.42 0.08,48.42 0.08,0.08 73.92,0.08 73.92,10.02 73.94,10.04 73.96,10.06 73.98,10.08 92.22,10.08 92.24,10.06 92.26,10.04 92.28,10.02 92.28,0.08 170.12,0.08 170.12,67.12 92.18,67.12 92.16,67.14 92.14,67.16 92.12,67.18 92.12,111.02 68.18,111.02 68.18,109.98 68.16,109.96 68.14,109.94 68.12,109.92 19.78,109.92 19.76,109.94 19.74,109.96 19.72,109.98 19.72,111.02 0.08,111.02 0.08,66.48 6.42,66.48 6.44,66.46 6.46,66.44 6.48,66.42 6.48,48.48 6.46,48.46 6.44,48.44
  pour Top: 44.53,100.68 49.02,100.68 49.02,105.97 48.07,106.92 44.33,106.92 44.28,106.87 44.28,100.93
  pour Top: 10.82,96.87 10.17,97.52 3.83,97.52 2.88,96.57 2.88,89.73 3.43,89.18 10.47,89.18 10.82,89.53
  pour Top: 9.98,60.98 33.17,60.98 33.42,61.23 33.42,73.07 31.17,75.32 10.83,75.32 9.98,74.47
  pour Top: 51.52,62.12 51.44,62.04 51.42,62.02 9.44,62.02 8.78,61.08 8.78,31.33 10.23,29.88 54.72,29.88 51.54,33.06 51.52,33.08
  pour Top: 71.96,19.54 71.98,19.52 71.98,12.03 72.13,11.88 81.92,11.88 81.92,22.42 81.94,22.44 82.02,22.52 75.13,22.52 74.84,22.24 74.82,22.22 74.03,22.22 71.66,19.85
  pour Top: 76.56,36.04 76.58,36.02 76.58,28.68 76.66,28.76 76.68,28.78 85.77,28.78 85.92,28.93 85.92,36.52 85.84,36.44 85.82,36.42 76.62,36.42 76.33,36.28
  pour Top: 118.93,45.58 125.57,45.58 125.92,45.93 125.92,50.67 123.77,52.82 117.93,52.82 115.48,50.37 115.48,49.03
  pour Top: 163.33,17.88 168.52,17.88 168.52,23.67 152.47,39.72 147.27,39.72 144.9,36.31
  pour Bottom: 41.66,51.24 41.68,51.22 41.68,50.98 42.46,51.76 42.48,51.78 46.02,51.78 46.02,58.97 42.97,62.02 36.32,62.02 32.73,60.18
  pour Bottom: 19.56,103.54 19.58,103.52 19.58,99.48 19.96,99.86 19.98,99.88 26.53,99.88 26.52,99.88 26.52,104.32 19.17,103.93
  pour Bottom: 10.42,91.42 10.34,91.34 10.32,91.32 2.08,91.32 2.28,88.82 2.28,88.82 2.28,88.8 2.28,88.79 2.28,88.79 2.28,69.43 3.03,68.68 9.87,68.68 10.42,69.23
  pour Bottom: 67.63,19.48 92.62,19.48 92.62,38.47 80.27,50.82 46.73,50.82 45.26,49.35 41.8,45.3
  pour Bottom: 89.26,57.24 89.28,57.22 89.28,49.48 108.27,49.48 108.32,49.53 108.32,54.77 96.87,66.22 93.08,66.22 93.06,66.24 90.17,69.12 80.63,69.12 80.47,68.97 80.28,66.33 88.96,57.64 88.98,57.62 88.98,57.53
  pour Bottom: 157.92,40.73 157.92,42.87 146.94,53.86 146.92,53.88 146.92,55.12 139.23,55.12 138.78,54.67 138.78,40.63 145.03,34.38 151.57,34.38
  pour Bottom: 107.43,50.18 143.17,50.18 143.32,50.33 143.32,53.87 141.37,55.82 108.23,55.82 107.86,55.45 107.86,55.45 107.85,55.44 107.84,55.44 107.84,55.43 107.08,54.86 107.08,50.53
  pour Top: 90.94,69.64 91.22,69.92 85.68,69.92 85.66,69.94 85.58,70.01 85.68,67.42 85.68,67.42 85.68,67.4 85.68,67.39 85.68,67.39 85.68,56.93 87.33,55.28 95.57,55.28 96.82,56.53 96.82,63.77 94.47,66.12 90.98,66.12 90.96,66.14 90.94,66.16 90.92,66.18 90.92,69.62
  pour Top: 9.02,69.48 9.02,88.03 9.02,88.02 2.59,88.02 2.77,86.92 2.78,86.92 2.78,86.91 2.78,86.9 2.78,86.89 2.78,71.43 4.73,69.48 9.03,69.48
GPIO8
  Top 0.15: R1.2 19.18,48.63 U2.10
I2C_PW  (via drill 0.3)
  Top 0.15: 157.06,7.29 157.68,7.29 R1_PINH.2 157.75,7.29 159.07,7.29 R2_PINH.2 | 157.06,7.29 156.37,7.29 C1.1 156.3,7.29 154.98,7.29 C2.1 | 157.06,7.29 157.06,5.56 156.85,5.35 154.43,5.35 153.94,5.84 153.94,7.84 155.81,9.71 155.81,10.27 SENSOR2.8 155.88,10.34 v155.88,11.45 | SENSOR2.6 157.41,10.34 157.41,10.96 156.71,11.65 156.71,13.18 SENSOR2.2 156.64,13.25 156.64,13.45 156.3,13.8 v156.3,14.08 | v23.06,67.75 21.81,66.5 21.81,66.22 U2.17
  Bottom 0.15: v23.06,67.75 91.13,67.75 105.58,53.3 137.27,53.3 138.27,52.3 143.83,52.3 150.55,45.59 151.17,45.59 156.3,40.46 v156.3,14.08 156.3,14.01 155.88,13.59 v155.88,11.45
INT_RTC  (via drill 0.3)
  Top 0.15: U3.3 | v32.96,58.05 25.83,58.05 16.76,48.98 16.76,48.7 U2.8 | v87.32,60.41 87.95,60.41 88.92,61.38 R1_PINH1.1 88.92,61.45 88.69,61.68 88.69,69.1 89.89,70.31
  Top 0.152: R1_PINH1.1 88.93,59.03 U3.3 | 89.89,70.31 89.89,73.57 TP15.TP
  Bottom 0.15: v32.96,58.05 35.32,60.41 v87.32,60.41
IO/BOOT
  Top 0.15: C6.1 27.7,107.77 27.21,107.77 25.83,109.16 BOOT_BUTTON.3 25.76,109.23 22.3,109.23 BOOT_BUTTON.4 | 20.36,107.77 R_BOOT.2 | 24.31,101.48 U2.15
  Top 0.152: BOOT_BUTTON.4 20.79,109.19 20.36,108.76 20.36,107.77 | R_BOOT.2 24.31,103.76 24.31,101.48
IO/CHANGE
  Top 0.15: C10.1 67.59,107.7 67.31,107.7 65.79,109.23 CHANGE_BUTTON.3 65.72,109.23 62.33,109.23 CHANGE_BUTTON.4 62.26,109.23 60.73,107.7 60.45,107.7 R_CHANGE.2 60.39,107.63 26.25,73.49 26.25,66.57 24.24,64.56 15.51,64.56 14.2,65.88 14.2,66.15 U2.23
MISO  (via drill 0.3)
  Top 0.15: R8.1 44.94,34.37 44.94,36.45 D12.1 44.87,36.52 44.87,36.79 42.73,38.94 v42.73,45.03 | 29.54,69.37 28.19,70.72 TP6.TP | 29.54,69.37 36.08,62.83 36.08,59.23 35.46,58.61 35.46,58.33 U1.2 35.52,58.33 35.73,58.12 v36.29,58.12 | 29.54,69.37 24.45,64.28 10.73,64.28 9.07,65.95 9.07,66.15 U2.27 9,66.22 8.61,66.62 v8.61,68.53 | v8.52,90.74 5.68,93.58 5.19,93.58 J4.P7
  Bottom 0.15: v42.73,45.03 42.73,51.68 v36.29,58.12 | v8.61,68.53 8.52,68.62 v8.52,90.74
MOSI  (via drill 0.3)
  Top 0.15: v16.24,45.88 16.24,46.77 U2.7 | v15.44,41.29 16.9,39.84 TP7.TP | v6.23,67.05 6.23,70.93 4.16,73.01 4.16,88.24 J4.P3 | v49.65,33.74 49.51,33.74 48.96,34.3 R7.1 48.89,34.37 48.89,36.52 D11.1 | 82.41,15.32 J1.14 | U1.5 43.14,55.7 43.14,51.47 v38.23,46.56 v29.09,46.56
  Top 0.152: v82.35,14.56 82.35,15.27 82.41,15.32
  Bottom 0.15: v16.24,45.88 16.24,45 | 16.24,45 16.24,43.8 | 16.24,43.8 16.24,42.09 v15.44,41.29 | v6.23,67.05 7.34,65.95 7.34,50.09 11.46,45.96 15.28,45.96 16.24,45 | v38.23,46.56 38.23,45.24 49.65,33.81 v49.65,33.74 69.32,14.08 81.41,14.08 81.55,13.93 82.13,13.93 82.27,14.08 | 16.24,43.8 19,46.56 v29.09,46.56
  Bottom 0.152: v82.35,14.56 82.27,14.48 82.27,14.08
N$1
  Top 0.15: R2-USB1.2 152.9,44.06 153.11,44.06 153.74,43.44 154.63,43.44 163.64,52.44 163.64,52.79 163.84,53 164.4,53 J2.A5
N$2
  Top 0.15: 89.06,36.31 92.59,36.31 92.66,36.38 93.76,36.38 C4.1 | 89.06,36.31 88.43,36.93 D3.2 | D4.1 88.43,33.4 88.43,35.62 89.06,36.24 89.06,36.31
N$3
  Top 0.15: R1_BAT.1 118.07,49.53 119.25,48.36 129.22,48.36 129.84,47.73 130.05,47.73 MCP73831.1
N$4
  Top 0.15: CHG_LED.C 123.2,49.6 119.18,49.6 R1_BAT.2
N$5
  Top 0.15: R2-USB.1 152.84,42.68 150.55,44.96 150.55,47.94 158.58,55.97 164.4,55.97 J2.B5
N$6
  Top 0.15: R2_BAT.2 127.42,44.69 127.42,47.59 127.49,47.66 MCP73831.5
N$8
  Top 0.15: J1.22 78.32,15.39 78.32,19.34 77.49,20.17 EPD_C10.1
N$9
  Top 0.15: J1.24 77.35,15.39 74.37,15.39 72.16,17.61 70.91,17.61 70.36,17.05 EPD_C12.1
N$10
  Top 0.15: D2.1 118.97,36.1 120.77,36.1 122.5,34.37 C1_BAT1.1 122.57,34.37 124.37,36.17 IC4.3 124.3,36.17 123.75,36.72 123.75,37.55 123.89,37.69 123.96,37.69 124.37,38.11 IC4.1 124.44,38.18 125.2,38.94 130.95,38.94 135.87,43.86 136.56,43.86 Q1.2
N$11
  Top 0.15: J1.20 79.36,15.39 79.36,18.72 80.81,20.17 EPD_C8.1
N$12
  Top 0.15: J1.19 79.92,15.39 79.92,17.61 82.48,20.17 EPD_C7.1
N$13
  Top 0.15: J1.18 80.4,15.39 80.4,16.43 84.14,20.17 EPD_C6.1
N$14
  Top 0.15: J1.5 86.91,15.39 86.91,19.83 87.19,20.1 EPD_C2.1
N$15
  Top 0.15: J1.4 87.39,15.39 87.39,18.79 88.71,20.1 EPD_C1.1
N$16
  Top 0.15: C_DELAY.1 51.07,102.32 IC1.5
N$17
  Top 0.15: R_CAPACITOR.1 94.25,48.91 94.25,57.08 93.63,57.7 93.63,60.75 94.25,61.38 D7.1
PREVGH  (via drill 0.3)
  Top 0.15: J1.21 78.88,15.39 78.88,19.89 79.15,20.17 EPD_C9.1 79.22,20.24 79.43,20.45 v79.98,20.45 | v82.89,39.08 82.89,40.88 D5.1
  Bottom 0.15: v82.89,39.08 82.89,37.48 79.36,33.95 79.36,21.07 v79.98,20.45
PREVGL  (via drill 0.3)
  Top 0.15: EPD_C11.1 73.96,14.7 77.63,14.7 77.84,14.91 77.84,15.32 J1.23 77.84,15.39 77.84,15.74 76.8,16.78 76.8,20.66 76.94,20.8 79.57,20.8 79.84,21.07 v79.98,21.07 | v85.59,27.03 91.89,33.33 D4.2
  Bottom 0.15: v85.59,27.03 85.59,26.68 v79.98,21.07
RESE
  Top 0.15: J1.3 87.81,15.32 87.81,14.91 83.38,10.48 67.73,10.48 R3.1 67.73,10.55 67.38,10.89 67.38,14.01 Q3.2
RESE'
  Top 0.15: R3.2 67.66,9.09 66.13,9.09 SJ1.2 66.06,9.09 66.06,10.75 R2.2
RESET  (via drill 0.3)
  Top 0.15: C5.1 52.56,107.7 52.28,107.7 50.83,109.16 RESET_BUTTON.3 50.76,109.23 47.3,109.23 | 47.3,109.23 44.84,109.23 | 47.3,109.23 RESET_BUTTON.4 | R_RESET.2 45.43,107.63 45.43,107.43 47.78,105.07 47.78,102.37 IC1.1 47.71,102.37 46.97,102.37 v46.95,102.39 | v10.32,53.97 10.32,48.7 U2.3
  Top 0.152: 44.84,109.23 44.38,109.23 v43.54,108.39
  Bottom 0.15: v10.32,53.97 10.32,65.18 7.39,68.11 5.43,68.11 4.36,69.18 4.36,88.52 18.67,102.83 24.4,102.83 24.99,102.24 46.95,102.24 | v43.54,108.39 43.54,107.79 46.95,104.37 46.95,102.24 | v46.95,102.39 46.95,102.24
RTC_RST  (via drill 0.3)
  Top 0.15: v23.96,65.05 23.06,65.95 23.06,66.15 U2.16 | U3.4 86.86,59.78 86.86,60.07 84.39,62.55 v81.12,62.55
  Bottom 0.15: v81.12,62.55 26.46,62.55 v23.96,65.05
RX
  Top 0.15: U2.24 12.81,66.22 12.81,71.14 12.7,71.25 TP2.TP
SCK  (via drill 0.3)
  Top 0.15: v14.13,45.38 14.13,48.63 U2.6 14.73,49.26 14.73,51.53 v14.03,52.23 15.33,50.93 18.29,50.93 25.69,58.33 32.62,58.33 32.89,58.61 v34.14,58.61 | v14.13,41.92 12.09,39.88 TP8.TP | v6.23,89.77 6.23,90.46 5.33,91.36 5.19,91.36 J4.P5 | v82.89,16.09 82.89,15.39 J1.13 | v53.34,34.88 53.33,34.83 R6.1 51.45,34.44 51.45,36.52 D10.1 | v43.21,56.39 43.21,57.01 U1.6
  Bottom 0.15: v14.13,41.92 v14.13,45.38 | v6.23,89.77 6.23,73.15 4.64,71.55 4.64,69.3 5.55,68.39 7.53,68.39 10.73,65.18 10.73,55.52 v14.03,52.23 | v82.89,16.09 82.89,16.5 76.66,22.73 76.66,28 69.78,34.88 55.18,34.88 | v53.34,34.88 55.18,34.88 | 55.18,34.88 43.21,46.85 v43.21,56.39 43.14,56.39 40.93,58.61 v34.14,58.61
SCL  (via drill 0.3)
  Top 0.15: v159.83,6.6 159.76,6.6 159.14,5.97 R2_PINH.1 | v158.93,12.55 158.31,13.18 SENSOR2.4 | v142.59,48.36 140.75,50.19 | 140.75,50.19 140.51,50.43 140.09,50.43 U4.7 | v147.02,37 149.03,37 165.23,20.8 J3.4 164.95,21 v164.19,20.24 | v18.84,65.05 18,65.88 18,66.15 U2.20 | v90.86,50.92 90.86,50.3 91.41,49.74 U3.16 | 140.75,50.19 141.27,50.71 141.27,51.06 140.85,51.47 v138.08,51.47
  Bottom 0.15: v159.83,6.6 159.83,11.65 v158.93,12.55 158.93,14.98 v164.19,20.24 | v142.59,48.36 142.59,41.43 v147.02,37 | v18.84,65.05 19.88,65.05 20.36,65.53 82.82,65.53 90.21,58.14 90.21,51.95 90.46,51.7 90.63,51.7 90.86,51.47 | v90.86,50.92 90.86,51.47 | 90.86,51.47 v138.08,51.47
SDA  (via drill 0.3)
  Top 0.15: v158.44,6.6 158.38,6.6 157.75,5.97 R1_PINH.1 | v158.44,12 157.47,12.97 157.47,13.18 SENSOR2.3 | v140.78,50.92 140.09,50.92 U4.8 | 163.33,20.07 163.64,19.76 165.23,19.76 J3.3 | 163.33,20.07 v146.39,37 | v163.29,20.03 163.33,20.07 | v19.88,67.26 19.25,66.64 19.25,66.22 U2.19 | v90.64,52.13 90.23,51.72 90.23,49.74 U3.15
  Bottom 0.15: v158.44,6.6 v158.44,12 158.44,15.19 v163.29,20.03 | v146.39,37 140.78,42.61 v140.78,50.92 139.26,50.92 137.15,53.03 90.91,53.03 90.64,53.3 | v19.88,67.26 81.51,67.26 90.64,58.13 90.64,53.3 | 90.64,53.3 v90.64,52.13
SRC  (via drill 0.3)
  Top 0.15: v86.15,37.69 93.76,37.69 C4.2 | v84.35,37.29 82.11,37.29 81.23,38.18 L1.1 81.16,38.25 79.5,39.91 79.5,40.88 D5.2 | v79.84,29.31 66.76,16.23 Q3.3
  Bottom 0.15: v86.15,37.69 85.75,37.29 v84.35,37.29 83.11,37.29 79.84,34.02 v79.84,29.31
SS_SD
  Top 0.15: 9.7,97.52 8.79,98.42 8.79,99.25 9.49,99.95 9.49,100.09 R10.1 | 9.7,97.52 12.88,97.52 13.57,98.22 D8.1 | 6.51,88.17 6.58,88.17 9.7,91.29 9.7,97.52 | 6.51,88.17 5.54,88.17 J4.P2 | 6.51,88.17 6.51,70.86 6.79,70.59 6.79,58.12 11.56,53.34 11.56,48.7 U2.4
TX
  Top 0.15: U2.25 11.56,66.22 11.56,67.95 8.03,71.49 TP1.TP
USB_D+  (via drill 0.3)
  Top 0.15: v151.03,45.1 150.83,45.31 150.83,47.25 151.38,47.8 151.66,47.8 D1.1 | v44.8,46.76 43.84,45.79 27.21,45.79 24.38,48.63 U2.14
  Bottom 0.15: v151.03,45.1 151.03,40.39 147.16,36.52 88.36,36.52 78.11,46.76 v44.8,46.76
USB_D-  (via drill 0.3)
  Top 0.15: v151.66,44.48 151.66,45.86 D1.3 | U2.13 23.06,48.7 23.06,48.98 23.75,49.67 24.86,49.67 28.46,46.07 38.36,46.07 38.57,46.28 43.7,46.28 v44.04,46.62
  Bottom 0.15: v151.66,44.48 151.66,40.6 147.29,36.24 88.22,36.24 78.18,46.28 44.39,46.28 v44.04,46.62
VBAT
  Top 0.3: 135.39,48.01 133.79,49.6 C2_BAT.1 133.65,49.67 130.12,49.67 MCP73831.3 | 135.39,48.01 135.66,47.73 135.66,46 Q1.3 | 135.39,48.01 137.39,50.01 | 137.39,50.5 137.39,51.54 137.74,51.89 137.74,61.98 TP3.TP | 137.39,50.5 137.39,50.01 | 137.39,50.01 137.42,49.98 U4.3 | U4.2 137.41,50.48 137.39,50.5
VBUS  (via drill 0.3)
  Top 0.3: C5_USB.1 156.02,48.15 155.81,48.15 154.57,46.9 154.22,46.9 D1.5 154.08,46.76 v152.7,46.76 | 149.16,44.62 149.16,40.25 149.58,39.84 PFMF.050.1.2 | 149.16,44.62 149.16,46.49 C4_USB.1 149.3,46.56 149.51,46.76 v150,46.76 | TP14.TP 127.42,63.18 127.42,49.74 MCP73831.4 127.49,49.6 124.72,49.6 CHG_LED.A 124.58,49.67 124.3,49.67 123.68,50.3 117.38,50.3 117.17,50.09 117.17,48.98 118.49,47.66 123.2,47.66 C1_BAT.1 123.33,47.59 123.33,42.75 | R1_PWRUSB.2 116.62,37.76 118.42,37.76 118.9,38.25 D2.2 118.97,38.38 123.33,42.75 | 123.33,42.75 123.47,42.68 127.91,42.68 129.08,43.86 134.69,43.86 Q1.1 134.83,43.93 135.52,44.62 149.16,44.62
  Bottom 0.3: v150,46.76 v152.7,46.76
VRTC
  Top 0.3: C10_SUPERCAP.2 97.02,47.73 94.32,47.73 R_CAPACITOR.2 94.25,47.59 92.47,47.59 C8.1 92.03,47.39 91.41,48.01 90.16,48.01 88.92,49.26 88.92,49.67 U3.14
VUSB
  Top 0.3: J2.A9 164.4,56.8 164.4,56.6 J2.B4 164.54,56.46 165.16,56.46 165.65,55.97 165.65,52.58 165.16,52.1 164.54,52.1 J2.B9 164.4,52.03 164.4,51.75 J2.A4 164.26,51.68 163.71,51.68 154.84,42.82 154.84,40.53 154.15,39.84 PFMF.050.1.1